# EAGLE board M152X (EAGLE 6.6.0)
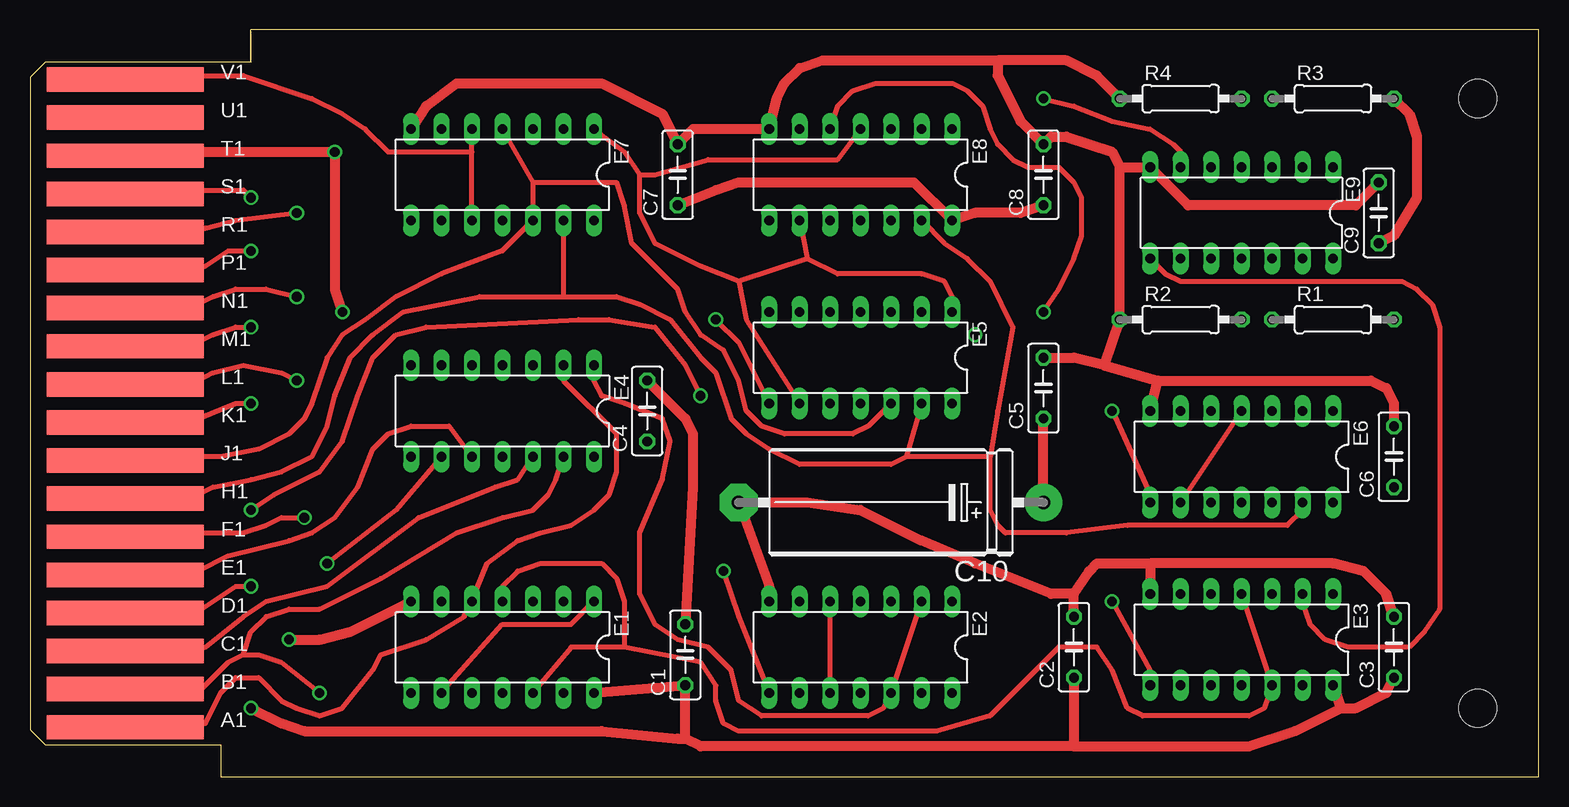
[diagram p0: board, top side]
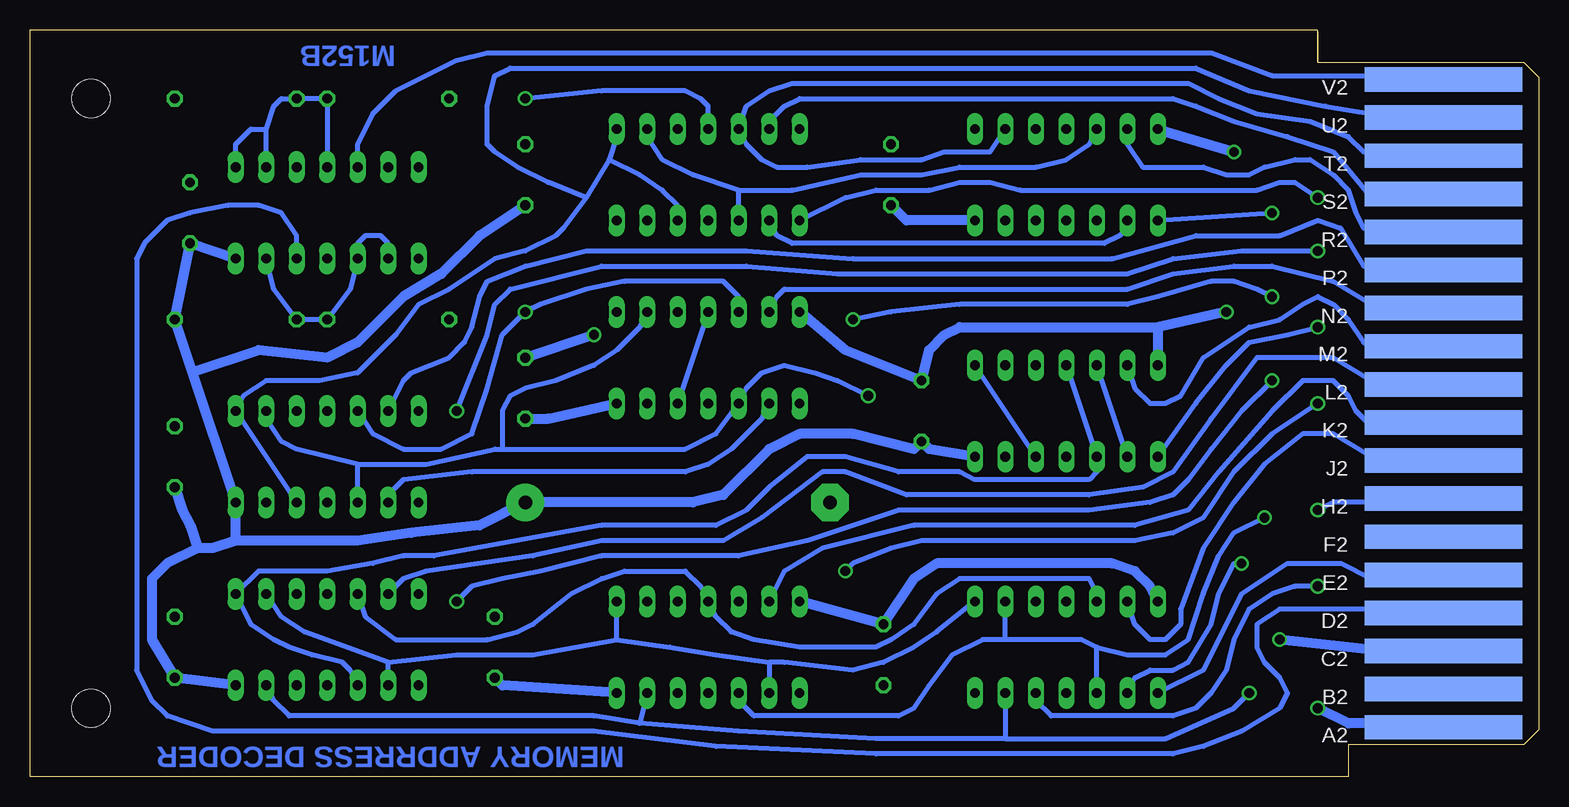
[diagram p1: board, bottom side, seen from below]

Size 125.73 x 62.23 mm. Coordinates in mm from the lower left corner, seen from the top.
Copper layers (1+16): Top 0.035mm / dielectric 1.5mm / Bottom 0.035mm
Design rules "16mils": minimum track width 16mil, minimum drill 32mil, track to track 15mil, track to pad 10mil, pad to pad 10mil, via to via 10mil, smd to smd 10mil, copper to edge 13mil, drill to drill 10mil, minimum pad ring 10mil, minimum via ring 8mil, stop-mask expansion 0mil, vias tented up to drill 0mil, thermal gap 10mil
Net classes: 1 supply: width 0.813 mm

## Footprints (pad centres in the part's own frame; a part is rotated, then mirrored left to right if it is on the bottom)
C050-025X075 = drill 0.813 octagon: 1 -2.54,0; 2 2.54,0
E25-9 = drill 1.118 pad 3.15: + -12.7,0 | drill 1.118 pad 3.15 octagon: - 12.7,0
DIL14 = drill 0.813 long: 1 -7.62,-3.81; 2 -5.08,-3.81; 3 -2.54,-3.81; 4 0,-3.81; 5 2.54,-3.81; 6 5.08,-3.81; 7 7.62,-3.81; 8 7.62,3.81; 9 5.08,3.81; 10 2.54,3.81; 11 0,3.81; 12 -2.54,3.81; 13 -5.08,3.81; 14 -7.62,3.81
0207/10 = drill 0.813 octagon: 1 -5.08,0; 2 5.08,0
EDGE-CON2 = smd 13.106 x 2.032: A1 7.938,4.128; B1 7.938,7.303; C1 7.938,10.477; D1 7.938,13.652; E1 7.938,16.828; F1 7.938,20.003; H1 7.938,23.177; J1 7.938,26.352; K1 7.938,29.527; L1 7.938,32.703; M1 7.938,35.877; N1 7.938,39.053; P1 7.938,42.227; R1 7.938,45.403; S1 7.938,48.578; T1 7.938,51.752; U1 7.938,54.928; V1 7.938,58.102 | smd 13.106 x 2.032 bottom: A2 7.938,4.128; B2 7.938,7.303; C2 7.938,10.477; D2 7.938,13.652; E2 7.938,16.828; F2 7.938,20.003; H2 7.938,23.177; J2 7.938,26.352; K2 7.938,29.527; L2 7.938,32.703; M2 7.938,35.877; N2 7.938,39.053; P2 7.938,42.227; R2 7.938,45.403; S2 7.938,48.578; T2 7.938,51.752; U2 7.938,54.928; V2 7.938,58.102
SINGLE = hole 3.175: 120.65,56.515; 120.65,5.715

## Placement (x,y rotation side)
C1  .01uF  [C050-025X075]  54.61,10.16 90 top
C2  .01uF  [C050-025X075]  87,10.79 90 top
C3  .01uF  [C050-025X075]  113.67,10.79 90 top
C4  .01uF  [C050-025X075]  51.44,30.48 90 top
C5  .01uF  [C050-025X075]  84.46,32.38 90 top
C6  .01uF  [C050-025X075]  113.67,26.67 90 top
C7  .01uF  [C050-025X075]  53.98,50.16 90 top
C8  .01uF  [C050-025X075]  84.46,50.16 90 top
C9  .01uF  [C050-025X075]  112.4,46.99 90 top
C10  150uF  [E25-9]  71.76,22.86 180 top
E1  74H21N  [DIL14]  39.37,10.79 180 top
E2  74H21N  [DIL14]  69.22,10.79 180 top
E3  74H21N  [DIL14]  100.97,11.43 180 top
E4  74H21N  [DIL14]  39.37,30.48 180 top
E5  74H21N  [DIL14]  69.22,34.92 180 top
E6  74H21N  [DIL14]  100.97,26.67 180 top
E7  74H21N  [DIL14]  39.37,50.16 180 top
E8  74H21N  [DIL14]  69.22,50.16 180 top
E9  74H20N  [DIL14]  100.97,46.99 180 top
R1  330  [0207/10]  108.59,38.1 0 top
R2  750  [0207/10]  95.89,38.1 0 top
R3  330  [0207/10]  108.59,56.52 0 top
R4  750  [0207/10]  95.89,56.52 0 top
U$1  [EDGE-CON2]  0,0 0 top
U$2  OUTLINE-SINGLE  [SINGLE]  0,0 0 top

## Library data of the parts
C1-C10 R1-R4 = rcl
E1-E8 = 74xx-us
E9 U$1 U$2 = dec-con

## Nets
GND [supply]: C1.2 C2.2 C3.2 C4.2 C5.2 C6.2 C7.2 C8.2 C9.2 C10.- E1.7 E2.7 E3.7 E4.7 E5.7 E6.7 E7.7 E8.7 E9.7 R2.1 R4.1 U$1.C2 U$1.T1
N$1: E9.9 E9.10 E9.13 R1.1 R2.2
N$2: E9.1 E9.2 E9.4 R3.1 R4.2
N$3: E9.12 U$1.D2
N$4: E9.5 U$1.V2
N$5: E4.6 U$1.M2
N$6: E4.8 U$1.M1
N$7: E3.6 U$1.L2
N$8: E3.8 U$1.L1
N$9: E2.6 U$1.K2
N$10: E2.8 U$1.K1
N$11: E1.6 U$1.J2
N$12: E1.8 U$1.E2
N$13: E8.6 U$1.S2
N$14: E8.8 U$1.S1
N$15: E7.6 U$1.R2
N$16: E6.6 U$1.P2
N$17: E5.6 U$1.N2
N$18: E5.8 U$1.N1
N$19: E6.8 U$1.P1
N$20: E7.8 U$1.R1
N$21: E1.1 E1.9 E2.1 E2.9 E3.2 E3.9 E4.5 E4.9 E9.8
N$22: E3.1 E3.10 E4.4 E4.10 U$1.E1
N$23: E1.2 E1.10 E2.5 E2.10 U$1.F1
N$24: E2.2 E2.12 E4.1 E4.12 U$1.C1
N$25: E1.4 E1.12 E3.4 E3.12 U$1.D1
N$26: E1.5 E2.4 E3.5 E4.2 U$1.A1
N$27: E1.13 E2.13 E3.13 E4.13 U$1.B1
N$28: E5.1 E5.9 E6.4 E6.9 E7.1 E7.9 E8.4 E8.9 E9.6
N$29: E7.5 E7.10 E8.2 E8.10 U$1.V1
N$30: E5.2 E5.10 E6.2 E6.10 U$1.H2
N$31: E5.4 E5.12 E7.4 E7.12 U$1.J1
N$33: E5.5 E6.5 E7.2 E8.5 U$1.T2
N$34: E5.13 E6.13 E7.13 E8.13 U$1.H1
N$35: E6.1 E6.12 E8.1 E8.12 U$1.U2
VCC [supply]: C1.1 C2.1 C3.1 C4.1 C5.1 C6.1 C7.1 C8.1 C9.1 C10.+ E1.14 E2.14 E3.14 E4.14 E5.14 E6.14 E7.14 E8.14 E9.14 R1.2 R3.2 U$1.A2

## Tracks (layer width: path | path; a pad name or v marks a point on that pad's centre or on a via)
GND  (via drill 0.81)
  Top 0.813: v21.59,11.43 24.13,11.43 26.67,12.06 E1.7 | v26.04,38.73 25.4,40.64 v25.4,52.07 8.89,52.07 U$1.T1 | E2.7 61.6,15.88 C10.- 64.77,22.86 69.22,22.23 74.3,19.68 78.74,17.78 85.09,15.24 87,15.24 | C4.2 54.61,29.84 55.25,28.57 55.25,24.13 C1.2 | C5.2 87,34.92 89.54,34.29 | 89.54,34.29 R2.1 90.81,50.8 | E6.7 93.98,33.02 | 89.54,34.29 93.98,33.02 | 93.98,33.02 111.76,33.02 113.03,32.38 113.67,31.11 C6.2 | C2.2 87,15.24 | 87,15.24 88.27,17.14 88.9,17.78 93.35,17.78 | 93.35,17.78 E3.7 | C3.2 113.03,15.24 111.13,17.14 108.59,17.78 93.35,17.78 | 90.81,50.8 E9.7 96.52,47.62 110.49,47.62 C9.2 | 90.81,50.8 90.17,52.07 86.36,53.34 85.09,53.34 C8.2 82.55,54.61 80.65,58.42 80.65,59.69 | R4.1 88.9,58.42 86.36,59.69 80.65,59.69 | 80.65,59.69 66.04,59.69 64.14,59.05 62.87,57.78 62.23,56.52 E8.7 55.25,53.98 C7.2 52.71,55.24 47.63,57.78 35.56,57.78 33.02,55.88 E7.7
  Bottom 0.813: U$1.C2 10.16,10.16 v21.59,11.43 | E1.7 32.39,15.88 33.66,17.14 35.56,17.78 50.17,17.78 52.07,16.51 C1.2 E2.7 | C5.2 v78.74,36.83 | E5.7 57.79,35.56 C4.2 50.8,35.56 49.53,36.83 48.26,37.47 31.75,37.47 | 31.75,37.47 E4.7 | v26.04,38.73 31.75,37.47 | E7.7 v25.4,52.07
N$1
  Bottom 0.406: E9.13 105.41,40.64 R1.1 R2.2 99.06,40.64 E9.10 98.43,44.45 97.79,45.09 96.52,45.09 95.89,44.45 E9.9
N$2
  Bottom 0.406: E9.4 R4.2 R3.1 104.78,56.52 105.41,55.88 106.05,53.98 | E9.2 106.05,53.98 | E9.1 108.59,52.7 107.32,53.98 106.05,53.98
N$3
  Bottom 0.406: U$1.D2 12.07,13.97 21.59,13.97 23.5,12.7 23.5,10.79 22.86,9.53 21.59,8.26 20.96,6.99 21.59,5.71 24.77,3.81 27.94,2.54 30.48,1.91 55.25,1.91 68.58,2.54 78.74,3.81 110.49,3.81 114.3,5.08 115.57,6.35 116.84,8.89 116.84,43.18 116.21,44.45 114.3,46.35 112.4,46.99 109.22,47.62 106.68,47.62 104.78,46.99 103.51,45.09 E9.12
N$4
  Bottom 0.406: E9.5 98.43,52.7 97.16,55.24 95.25,57.15 90.17,59.69 87.63,60.33 27.31,60.33 22.23,58.42 8.89,58.42 U$1.V2
N$5
  Bottom 0.406: E4.6 33.66,32.38 32.39,31.11 31.12,31.11 29.85,31.75 27.94,34.92 24.13,37.47 21.59,38.1 19.69,39.37 18.42,40.01 17.15,39.37 15.88,38.1 14.61,36.2 13.97,35.56 8.26,35.56 U$1.M2
N$6  (via drill 0.81)
  Top 0.406: U$1.M1 8.89,36.2 13.97,36.2 15.24,36.83 17.15,37.47 v18.42,37.47
  Bottom 0.406: E4.8 28.58,31.11 26.04,34.29 24.13,36.2 20.96,36.83 v18.42,37.47
N$7
  Bottom 0.406: U$1.L2 10.16,33.02 13.97,33.02 17.15,34.92 23.5,34.92 27.31,29.84 30.48,25.4 33.02,24.13 37.47,23.5 52.71,23.5 57.79,25.4 59.69,25.4 64.77,21.59 67.95,19.68 78.11,19.68 83.82,18.41 92.71,17.14 94.62,16.51 E3.6
N$8  (via drill 0.81)
  Top 0.406: U$1.L1 8.26,33.02 13.97,33.02 15.24,33.66 17.78,34.29 20.96,33.66 v22.23,33.02 | v90.17,14.61 93.35,8.89 E3.8
  Bottom 0.406: v22.23,33.02 24.77,30.48 27.31,27.3 29.21,24.77 30.48,23.5 32.39,22.86 37.47,22.23 53.34,22.23 60.96,19.68 66.68,18.41 78.11,18.41 83.19,17.14 86.36,16.51 88.9,15.88 v90.17,14.61
N$9
  Bottom 0.406: U$1.K2 8.89,29.21 13.97,29.21 15.24,30.48 15.88,31.75 17.15,33.02 19.69,33.02 22.23,30.48 26.67,25.4 29.21,22.23 33.66,20.95 52.07,20.95 59.69,19.05 62.87,17.14 E2.6
N$10  (via drill 0.81)
  Top 0.406: U$1.K1 8.26,29.84 13.97,29.84 17.15,31.11 v18.42,31.11 | v57.79,17.14 59.06,13.34 E2.8
  Bottom 0.406: v18.42,31.11 22.23,28.57 25.4,25.4 27.94,21.59 30.48,20.32 33.66,19.68 51.44,19.68 53.98,19.05 57.15,17.78 v57.79,17.14
N$11
  Bottom 0.406: U$1.J2 8.89,26.35 8.89,26.67 13.97,26.67 17.15,28.57 19.69,28.57 22.86,26.04 25.4,22.86 27.94,19.05 29.85,13.97 29.85,12.7 31.12,11.43 32.39,11.43 33.66,12.7 E1.6
N$12
  Bottom 0.406: E1.8 27.94,8.89 24.77,15.24 20.96,17.78 16.51,17.78 13.97,16.51 8.89,16.51 U$1.E2
N$13
  Bottom 0.406: E8.6 64.14,54.61 62.87,55.88 61.6,56.52 30.48,56.52 28.58,55.88 25.4,54.61 20.96,53.34 17.15,52.07 13.97,48.26 8.26,48.26 U$1.S2
N$14  (via drill 0.81)
  Top 0.406: U$1.S1 8.89,48.26 10.8,48.9 17.78,48.9 v18.42,48.26
  Bottom 0.406: E8.8 57.79,48.26 55.25,48.9 50.8,48.9 48.26,49.53 45.72,49.53 43.18,48.9 23.5,48.9 21.59,49.53 20.32,49.53 v18.42,48.26
N$15
  Bottom 0.406: E7.6 34.29,52.7 33.02,50.8 27.94,50.8 26.04,50.16 24.13,50.16 22.86,50.8 20.32,51.44 19.05,51.44 17.15,50.16 15.88,48.9 15.24,46.99 14.61,45.72 13.34,45.09 8.26,45.09 U$1.R2
N$16
  Bottom 0.406: E6.6 94.62,33.02 93.98,33.66 90.81,34.92 89.54,36.2 88.9,37.47 88.27,40.01 87.63,41.27 84.46,42.55 79.38,43.81 66.04,43.81 57.15,43.18 35.56,43.18 28.58,45.09 21.59,45.09 18.42,46.35 16.51,45.72 14.61,42.55 8.89,42.55 U$1.P2
N$17
  Bottom 0.406: E5.6 63.5,40.01 62.87,40.64 34.29,40.64 30.48,41.91 25.4,42.55 22.23,42.55 17.15,41.27 13.97,39.37 8.26,39.37 U$1.N2
N$18  (via drill 0.81)
  Top 0.406: U$1.N1 8.89,38.73 12.07,39.37 13.97,39.37 15.24,40.01 17.15,40.64 19.69,40.64 v22.23,40.01 | v57.15,38.1 59.06,36.2 E5.8
  Bottom 0.406: v22.23,40.01 23.5,40.64 25.4,41.27 27.31,41.27 31.75,40.01 34.29,39.37 48.26,39.37 53.98,38.73 v57.15,38.1
N$19  (via drill 0.81)
  Top 0.406: U$1.P1 8.89,42.55 14.61,42.55 16.51,43.81 v18.42,43.81 | v90.17,30.48 93.35,23.5 E6.8
  Bottom 0.406: v90.17,30.48 87.63,36.83 87,39.37 85.73,40.64 78.11,42.55 66.04,42.55 58.42,41.91 34.29,41.91 30.48,43.18 24.77,43.81 v18.42,43.81
N$20  (via drill 0.81)
  Top 0.406: U$1.R1 8.89,45.72 14.61,45.72 17.15,46.35 v22.23,46.99
  Bottom 0.406: E7.8 v22.23,46.99
N$21  (via drill 0.81)
  Top 0.406: E4.9 30.48,22.23 v24.77,17.78 | E1.9 39.37,12.7 45.09,12.7 E1.1 | E9.8 94.62,41.91 95.89,41.27 114.3,41.27 115.57,40.64 116.84,39.37 117.48,37.47 117.48,13.97 116.21,12.06 114.94,10.79 109.86,10.79 107.95,11.43 106.68,12.7 106.09,14.36 E3.2
  Bottom 0.406: E4.9 E4.5 | E3.9 95.89,9.53 | 95.89,9.53 102.87,12.06 104.78,13.34 E3.2 | 95.89,9.53 90.17,10.16 83.82,10.16 76.84,11.43 | E1.9 33.66,8.26 32.39,8.89 30.48,8.89 29.21,9.53 27.31,12.7 26.67,15.24 25.4,17.78 v24.77,17.78 | E1.1 50.17,12.06 52.07,10.79 54.61,9.53 57.15,8.89 62.87,9.53 64.14,9.53 | 64.14,9.53 E2.9 | 76.84,11.43 E2.1 | 76.84,11.43 72.39,10.79 68.58,10.16 64.14,9.53
N$22
  Top 0.406: U$1.E1 8.26,16.51 13.97,17.14 16.51,18.41 21.59,19.68 23.5,20.32 25.4,21.59 27.31,24.13 28.58,27.3 29.85,28.57 31.75,29.21 34.93,29.21 E4.10
  Bottom 0.406: E4.4 E4.10 36.83,25.4 37.47,24.77 46.99,24.77 48.26,25.4 53.34,25.4 57.79,26.67 60.96,26.67 64.14,24.13 66.04,22.23 68.58,20.95 78.11,20.95 92.08,18.41 94.62,18.41 97.16,17.78 100.97,17.14 106.68,17.14 E3.1 107.32,12.7 105.41,11.43 104.14,10.79 102.24,10.16 99.7,9.53 99.06,8.89 E3.10
N$23  (via drill 0.81)
  Top 0.406: U$1.F1 8.89,20.32 17.78,20.32 19.69,20.95 20.96,21.59 v22.86,21.59 | E2.10 E2.5
  Bottom 0.406: E1.10 36.83,10.79 | 36.83,10.79 38.1,11.43 44.45,11.43 | 44.45,11.43 E1.2 | 36.83,10.79 34.29,10.16 31.12,10.16 29.21,11.43 27.94,15.24 26.67,18.41 25.4,20.32 v22.86,21.59 | 44.45,11.43 46.36,11.43 48.9,10.16 50.8,7.62 52.07,5.71 53.34,5.08 65.41,5.08 66.68,6.35 E2.10
N$24
  Top 0.406: U$1.C1 9.53,10.79 14.61,10.79 17.78,13.34 19.69,14.61 24.77,15.88 32.39,21.59 38.74,24.13 40.64,24.77 E4.12 | E4.1 46.99,33.02 47.63,31.75 49.53,31.11 52.71,29.84 53.34,27.94 52.71,24.77 50.8,20.32 50.8,15.24 52.07,12.7 53.98,11.43 56.52,10.79 58.42,8.89 59.06,6.35 60.96,5.08 69.85,5.08 71.12,5.71 E2.12 E2.2
  Bottom 0.406: E4.12 E4.1
N$25  (via drill 0.81)
  Top 0.406: 49.53,10.79 55.88,9.53 57.15,7.62 57.15,6.35 57.79,4.45 59.06,3.81 75.57,3.81 80.01,5.08 85.73,10.79 88.9,10.79 90.17,8.89 91.44,5.71 92.71,5.08 101.6,5.08 102.87,5.71 E3.12 E3.4 | 49.53,10.79 45.09,10.79 E1.12 | E1.4 39.37,15.88 40.64,17.14 42.55,17.78 47.63,17.78 48.9,16.51 49.53,14.61 49.53,10.79 | U$1.D1 8.26,13.34 13.34,13.34 17.15,15.88 v18.42,15.88
  Bottom 0.406: v18.42,15.88 20.32,15.88 22.23,15.24 24.13,13.97 25.4,11.43 26.04,8.89 27.31,6.99 28.58,5.71 30.48,5.08 40.64,5.08 41.91,6.35 E1.12
N$26
  Top 0.406: U$1.A1 9.53,4.45 14.61,4.45 15.88,6.99 17.15,8.26 19.05,8.26 20.96,6.35 22.23,5.71 24.13,5.08 26.04,5.71 28.58,8.89 29.21,10.16 33.02,11.43 36.2,13.34 E1.5 38.1,17.78 40.64,19.68 42.55,20.32 45.09,20.95 46.99,22.23 48.26,23.5 48.9,25.4 48.9,28.57 44.45,33.02 E4.2
  Bottom 0.406: E3.5 97.79,13.34 95.25,11.43 87.63,11.43 85.09,12.06 83.82,12.7 80.65,15.24 78.11,16.51 76.2,17.14 71.12,17.14 69.85,15.88 E2.4 68.58,13.34 67.31,12.06 65.41,11.43 61.6,10.79 55.25,10.79 53.98,11.43 52.07,12.7 50.17,15.24 48.26,16.51 37.47,16.51 36.83,15.24 E1.5
N$27  (via drill 0.81)
  Top 0.406: U$1.B1 8.26,6.99 13.97,6.99 16.51,9.53 17.78,10.16 | 17.78,10.16 19.05,10.16 20.96,9.53 v24.13,6.99 | 17.78,10.16 18.42,12.06 19.69,13.34 21.59,13.97 24.13,13.97 29.21,16.51 35.56,20.32 39.37,21.59 41.91,22.23 43.18,23.5 43.82,24.77 E4.13
  Bottom 0.406: E1.13 44.45,3.17 | 44.45,3.17 31.12,3.17 25.4,5.71 v24.13,6.99 | 44.45,3.17 55.25,3.17 66.68,3.81 74.93,4.45 | E2.13 74.93,4.45 | 74.93,4.45 78.74,5.08 104.14,5.08 105.41,6.35 E3.13
N$28  (via drill 0.81)
  Top 0.406: E7.1 49.53,52.07 50.8,50.16 | 50.8,50.16 52.07,50.16 56.52,51.44 67.31,51.44 E8.4 | E8.9 64.77,43.18 | 64.77,43.18 59.06,41.27 | 59.06,41.27 59.69,38.1 E5.9 | 59.06,41.27 55.88,42.55 52.07,44.45 50.8,46.99 50.8,50.16 | E5.1 76.84,40.01 76.2,41.27 74.3,41.91 67.31,41.91 64.77,43.18 | E6.4 E6.9 | v84.46,56.52 87,55.88 90.17,54.61 93.35,53.98 95.25,52.7 95.89,52.07 E9.6
  Bottom 0.406: E5.9 64.77,29.84 67.31,27.3 69.22,26.04 71.12,25.4 88.9,25.4 94.62,24.77 95.89,23.5 E6.9 | E8.4 69.22,55.88 69.85,56.52 71.12,57.15 78.11,57.15 v84.46,56.52 | E7.9 34.29,45.72 34.93,45.09 36.2,44.45 62.23,44.45 63.5,45.09 E8.9
N$29
  Top 0.406: E7.10 36.83,52.07 | 36.83,52.07 E7.5 | U$1.V1 8.89,58.42 17.78,58.42 23.5,56.52 26.04,55.24 27.94,53.98 29.85,52.07 36.83,52.07
  Bottom 0.406: E8.10 66.68,48.9 | 66.68,48.9 70.49,50.16 73.03,51.44 74.3,53.34 E8.2 | 66.68,48.9 62.23,48.9 56.52,50.16 51.44,50.16 48.26,50.8 41.91,50.8 39.37,51.44 37.47,52.7 E7.5
N$30  (via drill 0.81)
  Top 0.406: v18.42,22.23 20.32,23.5 24.13,25.4 26.04,27.94 27.31,31.75 28.58,34.92 30.48,36.83 33.02,37.47 45.72,38.1 48.26,38.1 52.07,37.47 54.61,34.29 v55.88,31.75
  Bottom 0.406: U$1.H2 8.89,23.18 8.89,22.86 17.15,22.86 v18.42,22.23 | E6.10 98.43,26.04 | 98.43,26.04 103.51,27.3 104.78,27.94 106.05,29.84 E6.2 | 98.43,26.04 92.71,26.04 87,27.3 86.36,27.3 | 86.36,27.3 71.12,27.3 68.58,28.57 E5.10 66.04,32.38 64.77,33.66 62.87,34.29 60.33,33.66 58.42,33.02 v55.88,31.75 | E5.2 74.93,37.47 76.84,35.56 78.74,34.29 81.92,33.02 84.46,32.38 85.73,31.75 86.36,30.48 86.36,27.3
N$31
  Top 0.406: U$1.J1 8.89,26.67 15.88,26.67 19.05,27.3 21.59,28.57 22.86,29.84 23.5,31.11 24.77,34.92 26.04,36.83 27.94,38.1 30.48,40.01 34.29,41.91 39.37,43.81 E7.12 41.91,49.53 | E5.12 69.85,29.21 68.58,28.57 62.87,28.57 60.96,29.21 59.69,30.48 59.06,33.02 57.79,35.56 55.88,36.83 54.61,38.73 53.98,40.64 50.17,44.45 49.53,47.62 48.9,49.53 41.91,49.53 | E7.4 41.91,49.53
  Bottom 0.406: E5.4 E5.12
N$33  (via drill 0.81)
  Top 0.406: E8.5 67.31,55.88 68.58,57.15 70.49,57.78 76.84,57.78 78.11,57.15 79.38,55.88 80.01,53.98 80.65,52.7 81.92,51.44 83.19,50.8 85.73,50.8 87,49.53 87.63,48.26 87.63,45.09 87,43.18 85.73,40.64 v84.46,38.73
  Bottom 0.406: E6.5 97.16,28.57 94.62,27.3 91.44,27.3 88.9,28.57 87.63,32.38 86.36,36.83 v84.46,38.73 83.19,39.37 79.38,40.64 76.2,41.27 67.95,41.27 66.68,40.01 E5.5 | U$1.T2 8.89,52.07 14.61,52.07 15.88,53.34 19.05,54.61 23.5,55.24 26.67,56.52 29.21,57.78 62.23,57.78 64.14,57.15 66.04,55.88 E8.5 66.04,52.7 64.77,51.44 63.5,50.8 60.96,50.8 56.52,51.44 51.44,51.44 49.53,52.07 45.72,52.07 E7.2
N$34
  Top 0.406: U$1.H1 8.26,23.5 13.97,23.5 15.24,24.13 18.42,24.77 20.96,25.4 23.5,26.67 24.77,29.21 25.4,31.75 26.67,34.92 28.58,36.83 31.12,38.73 37.47,40.01 44.45,40.01 | 44.45,40.01 48.9,40.01 50.8,39.37 53.34,38.1 55.88,34.92 57.15,33.66 58.42,29.84 59.69,28.57 61.6,27.3 64.14,26.04 71.76,26.04 73.03,26.67 | E7.13 44.45,40.01 | E5.13 73.03,26.67 | E8.13 76.2,44.45 78.11,43.18 80.01,41.27 81.92,37.47 80.65,30.48 80.01,26.67 | E6.13 106.05,22.23 104.78,20.95 91.44,20.95 86.36,20.32 81.28,20.32 80.65,20.95 80.01,22.23 80.01,26.67 | 80.01,26.67 73.03,26.67
N$35
  Bottom 0.406: E8.1 76.84,53.34 77.47,51.44 | 77.47,51.44 74.93,50.16 73.03,48.9 71.76,47.62 E8.12 | 77.47,51.44 79.38,48.26 | 79.38,48.26 82.55,49.53 85.09,50.8 87,52.07 87.63,52.7 87.63,55.88 87,58.42 85.73,59.05 28.58,59.05 24.13,57.15 17.78,55.88 13.97,55.24 8.89,55.24 U$1.U2 | 79.38,48.26 81.28,45.72 81.92,45.09 84.46,43.81 87,43.18 90.81,40.64 93.35,39.37 95.25,36.83 98.43,33.66 101.6,33.02 106.05,33.02 107.95,31.75 E6.1 E6.12
VCC  (via drill 0.81)
  Top 0.813: v18.42,5.71 20.96,4.45 22.86,3.81 47.63,3.81 53.98,3.17 54.61,3.17 | 54.61,3.17 C1.1 E1.14 | C2.1 87,2.54 | 87,2.54 55.88,2.54 54.61,3.17 | C10.+ C5.1 | C7.1 57.15,48.9 59.06,49.53 73.66,49.53 E8.14 78.74,46.99 82.55,46.99 C8.1 | R3.2 114.94,55.24 115.57,53.34 115.57,48.26 113.67,45.09 C9.1 | 87,2.54 101.6,2.54 105.41,3.81 109.22,5.71 | 109.22,5.71 110.49,5.71 113.03,6.99 C3.1 | E3.14 109.22,5.71
  Bottom 0.813: U$1.A2 10.8,4.45 15.88,4.45 v18.42,5.71 | E2.14 86.36,7.62 C2.1 | 108.59,19.68 98.43,19.68 93.98,20.32 88.27,20.95 C10.+ 70.49,22.86 67.95,23.5 64.14,27.3 61.6,28.57 57.15,28.57 52.07,27.3 C4.1 50.8,27.3 E4.14 | 108.59,19.68 E6.14 112.2,33.72 | 108.59,19.68 110.49,19.05 111.76,19.05 | 111.76,19.05 114.3,17.78 115.57,16.51 115.57,11.43 C3.1 E3.14 | C6.1 113.03,22.23 112.4,20.95 111.76,19.05 | 112.2,33.72 R1.2 C9.1 E9.14 | C8.1 88.27,45.09 91.44,41.91 94.62,40.01 98.43,36.2 100.97,34.92 106.68,35.56 112.2,33.72 | C5.1 82.55,29.84 E5.14 | E7.14 52.71,46.35 C7.1

## Text on the board
Bottom: M152B | MEMORY ADDRRESS DECODER